# Altium PCB PCB1.PcbDoc
Units mil, origin at the board's own origin, x right, y up, seen from the top; angles counter-clockwise.
Board outline 1335 x 720 mil, 2 copper layers (Top Layer, Bottom Layer); 11 components, 8 nets, 29 pads, 5 vias.
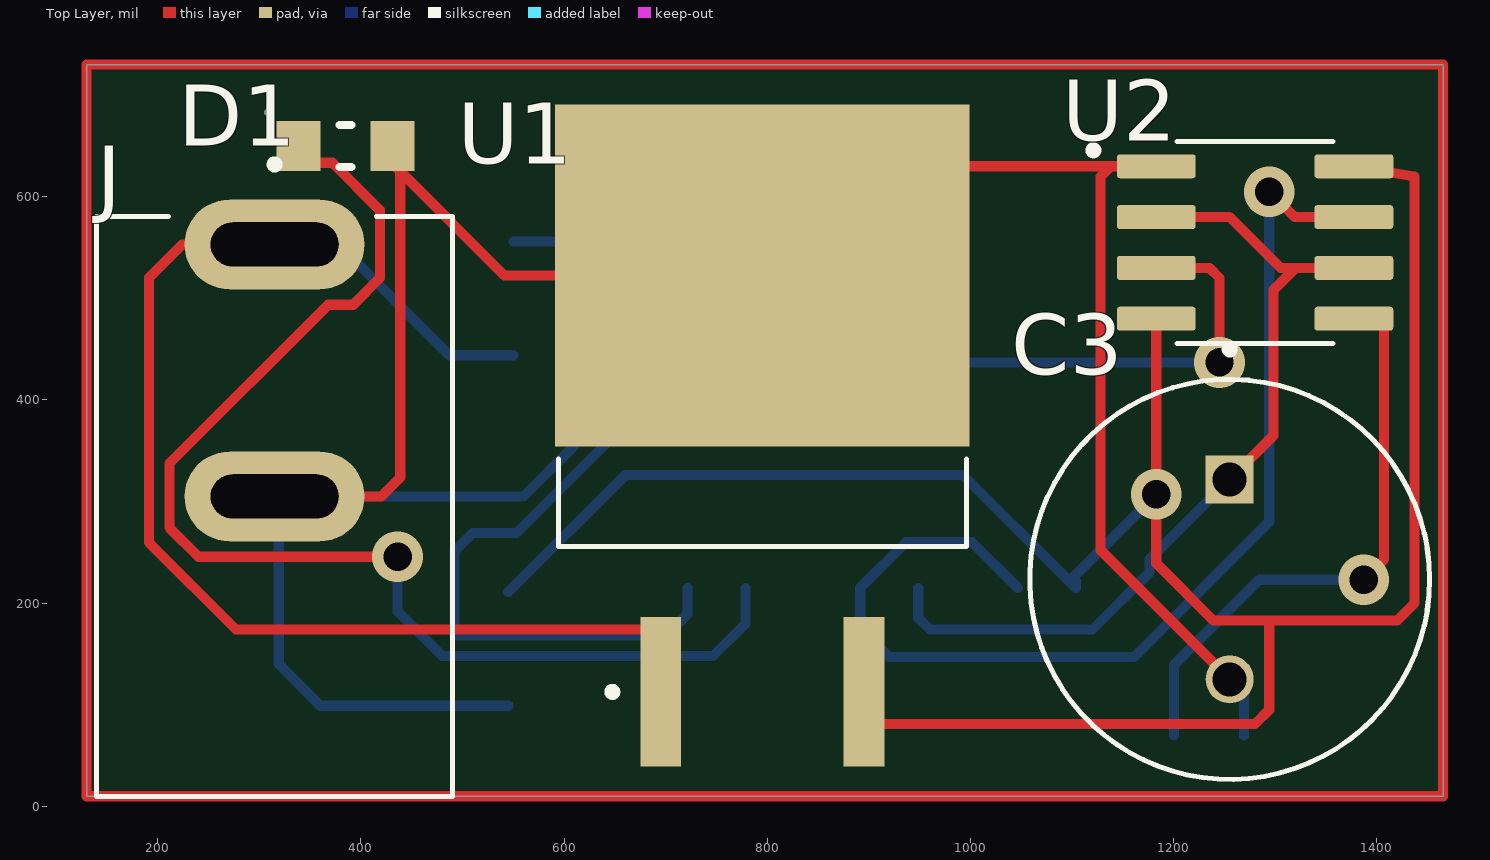
[diagram p0: Top Layer view]
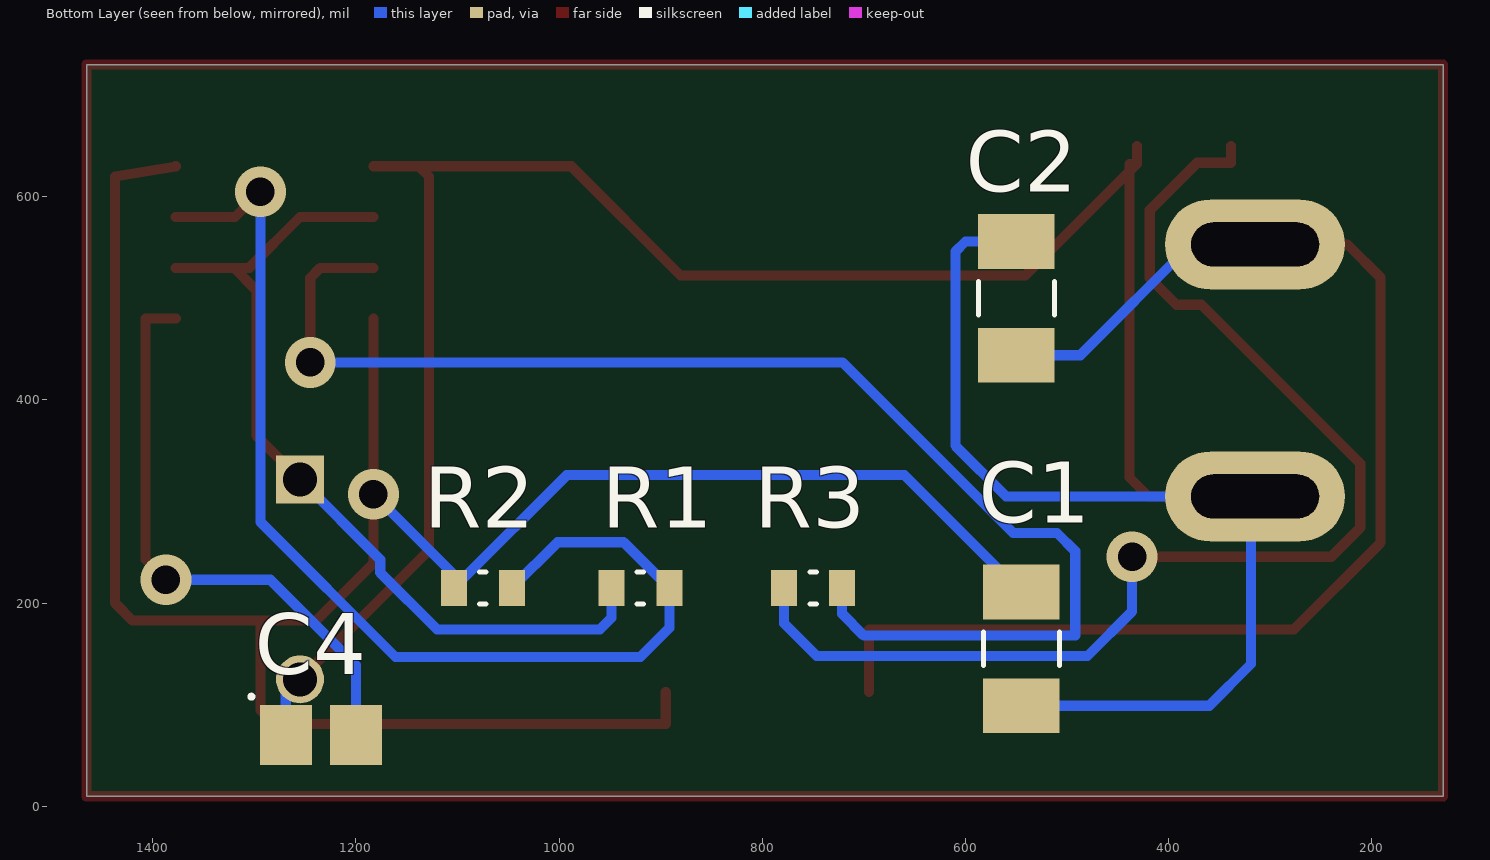
[diagram p1: Bottom Layer view, seen from below]
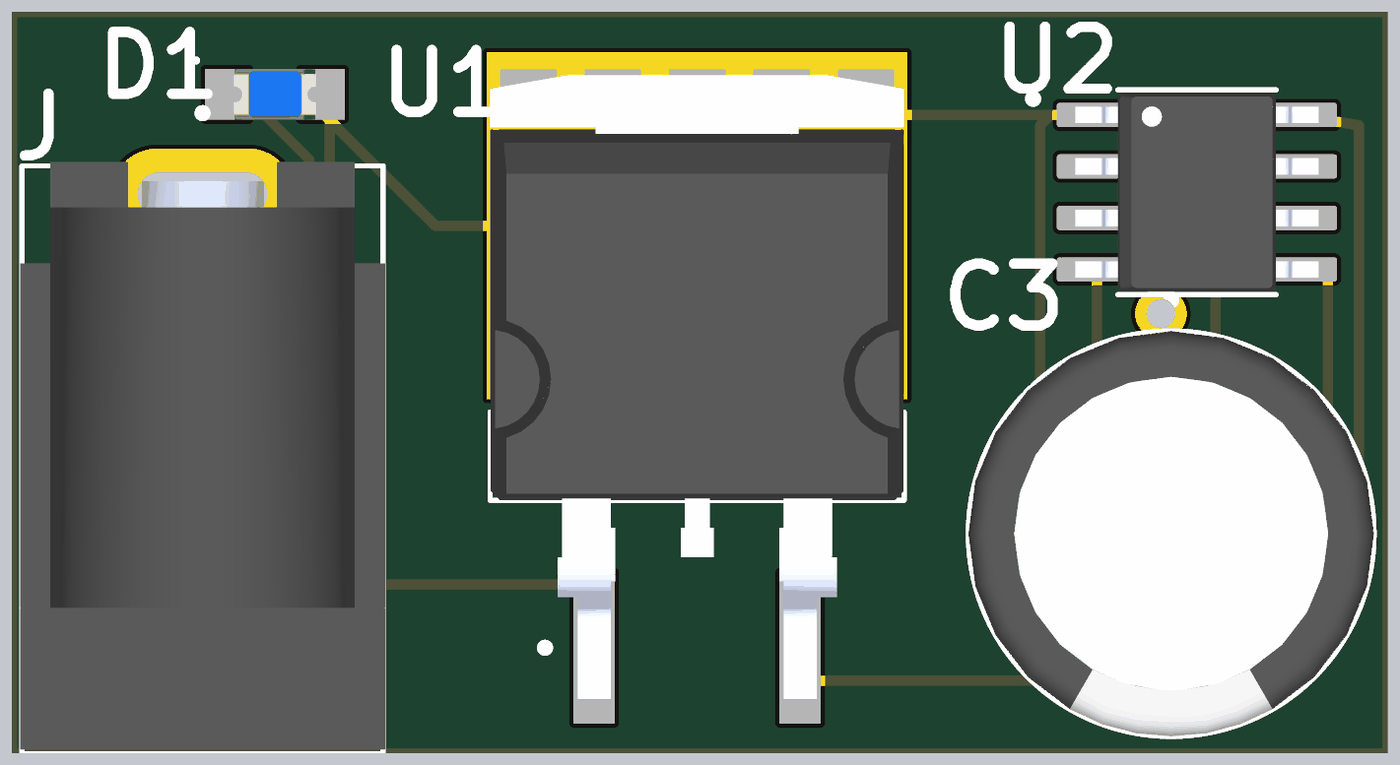
[diagram p2: 3D render of the assembled board from above, using the file's embedded part models]
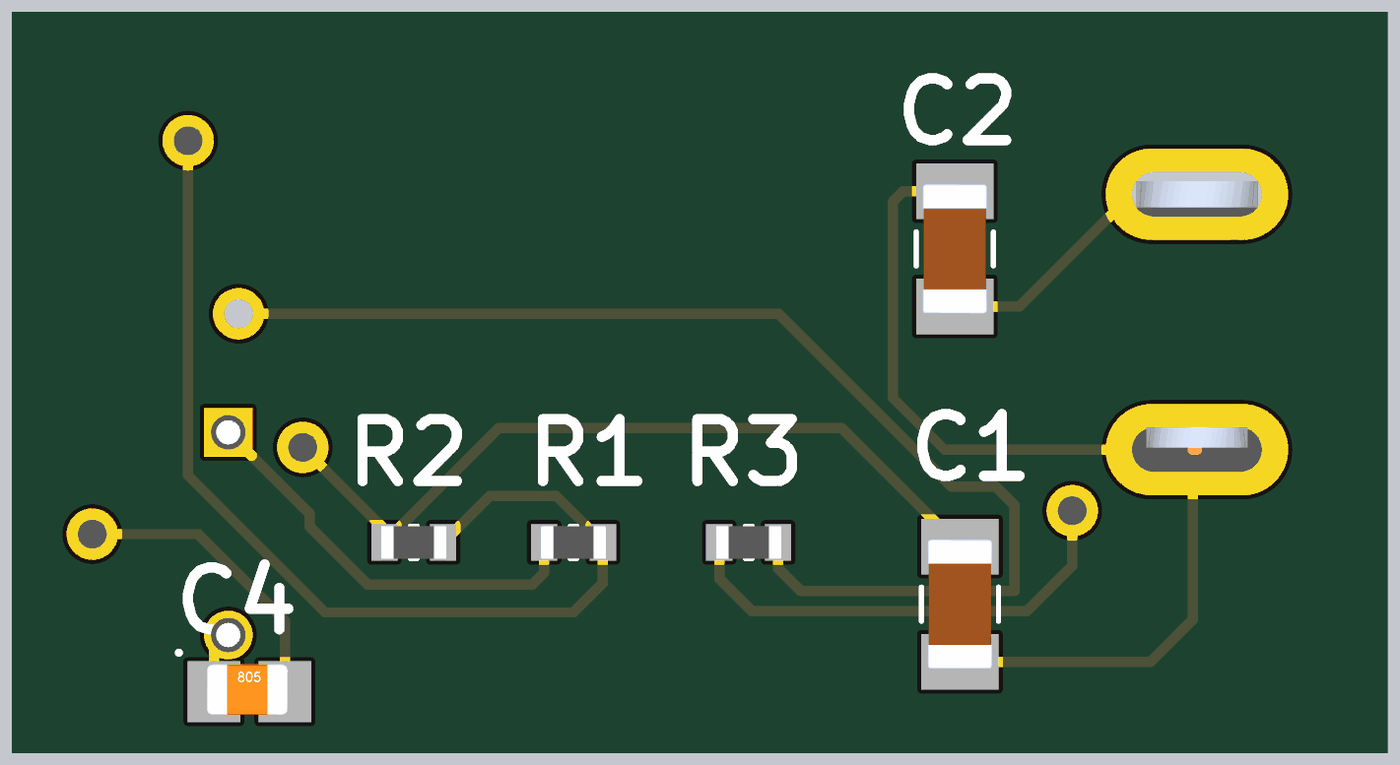
[diagram p3: 3D render of the assembled board from below, using the file's embedded part models]

## Layer stack, top to bottom
Top Solder: solder mask 0.4, Solder Resist, Dk 3.5
Top Layer: signal copper 1.4
Dielectric 1: dielectric 12.6, FR-4, Dk 4.8
Bottom Layer: signal copper 1.4
Bottom Solder: solder mask 0.4, Solder Resist, Dk 3.5

## Board outline
130,10 1465,10 1465,730 130,730

## Design rules (kind name [scope] priority, off if disabled: settings)
Clearance [All] p1: gap=10 ignorepadtopadclearanceinfootprint=FALSE
PolygonConnect [All] p1: connectstyle=Relief reliefconductorwidth=10 reliefentries=4 polygonreliefangle="90 Angle" airgapwidth=10
RoutingVias [All] p1: holewidth=28 width=50 viastyle="Through Hole" minholewidth=28 minwidth=50 maxholewidth=28 maxwidth=50
SolderMaskExpansion [All] p1: expansion=4 istentingtop=FALSE
SupplyNets "Schematic Supply Nets_2" [InNet('VCC')] p1: voltage=0.000
SupplyNets "Schematic Supply Nets_1" [InNet('GND')] p2: voltage=0.000
Width [All] p1: maxlimit=10 minlimit=10 preferedwidth=10
30 further rules are at their usual default settings.

## Components (designator, comment, footprint, x,y, rotation, side; value= is the part's Value field where it differs from the comment)
C1 ".1µF" CAPC3216X190N 545,155 r270 bottom
C2 ".33µF" CAPC3216X190N 550,500 r90 bottom
C3 "EEUED2G100" CAPPRD500W60D1000H2000 1255,223.43 r270 top
C4 "100nF Ceramic Multilayer Capacitor_1" CAPCP2012X09N 1234.52,70 r180 bottom
D1 "Kingbright Blue LED, 60 mcd 120 ° 0805" LED1913X12NBLUE 385,650 r0 top
J "PJ-037AH" CUI_PJ-037AH 315,553.03 r270 top
R1 "Resistor" RES_ERJS03F1001V 920,215 r180 bottom value=1K
R2 "Resistor" RES_ERJS03F1001V 1075,215 r180 bottom value=1K
R3 "Resistor" RES_ERJS03F1001V 750,215 r180 bottom value=1K
U1 "7805CD2T" TO254P1542X460-3N 795,365 r90 top
U2 "LM555CM/NOPB" SOIC127P599X175-8N 1280,555 r0 top

## Footprints (in the part's own frame and the unit in brackets; to place one, negate y for a bottom-side part, rotate by r counter-clockwise, add the part's x,y. Pads: shape width x height; smd on the part's side, far side on the other; paste and mask are expansions set on the pad)
CAPC3216X190N [mm]
  rect 1.37x1.91 smd: 1(-1.421,0) 2(1.421,0)
  silkscreen extent -0.42,-0.95 0.42,0.95, body extent -1.6,-0.8 1.6,0.8, height 1.9
CAPCP2012X09N [mm] "Chip Capacitor, 2-Leads, Body 2.00x1.25mm, IPC Medium Density"
  rect 1.3x1.5 smd: 1(-0.875,0) 2(0.875,0)
  silkscreen extent -1.79,0.91 -1.69,1.01, body extent -1.05,-0.57 0.95,0.68, height 0.78
CAPPRD500W60D1000H2000 [mm]
  round 1.2 hole 0.85: N(2.5,0)
  rect 1.2x1.2 / inner round 1.2 / far side rect 1.2x1.2 hole 0.85: P(-2.5,0)
  silkscreen extent -5.85,-5 5,5, body extent -5,-5 5,5, height 20
CUI_PJ-037AH [mm]
  oval 2.25x4.5 hole 1.1 slot 3.2 at 90 deg: 1(0,0) 2(6.3,0)
  silkscreen extent -2.1,-4.45 13.8,4.45, body extent -0.8,-4.5 13.7,4.5, height 11
LED1913X12NBLUE [mm] "LED 2-Leads, Body 1.90x1.32mm, IPC Medium Density"
  rect 1.1x1.25 smd: 1(-1.175,0) 2(1.175,0)
  silkscreen extent -1.99,-0.53 0.15,0.89, body extent -1,-0.62 1.02,0.63, height 1.1
RES_ERJS03F1001V [mm]
  rect 0.65x0.9 smd: 1(-0.725,0) 2(0.725,0)
  silkscreen extent -0.08,-0.4 0.08,0.4, body extent -0.8,-0.4 0.8,0.4, height 0.45
SOIC127P599X175-8N [mm]
  rrect25% 1.97x0.6 smd: 1(-2.47,1.905) 2(-2.47,0.635) 3(-2.47,-0.635) 4(-2.47,-1.905) 5(2.47,-1.905) 6(2.47,-0.635) 7(2.47,0.635) 8(2.47,1.905)
  silkscreen extent -4.14,-2.53 1.95,2.53, body extent -3,-2.45 3,2.45, height 1.75
TO254P1542X460-3N [mm]
  rect 3.74x1.02 smd: 1(-6.41,2.54) 2(-6.41,-2.54)
  rect 8.56x10.37 smd paste-6: 3(4,0)
  silkscreen extent -6.51,-5.1 -0.59,5.1, body extent -7.71,-5.1 7.71,5.1, height 4.6

## Part data
C1 C2: library part GRM31CR60J227ME11L, "SMD Multilayer Ceramic Capacitor, GRM Series, 220 F, 20%, X5R, 6.3 V, 1206 [3216 Metric]", Package="3216 Murata", Check_prices=https://www.snapeda.com/parts/GRM31CR60J227ME11L/Murata%20Electronics%20North%20America/view-part/1756709/?ref=eda, Digi-Key_Part_Number=490-13970-1-ND, MF="Murata Electronics", MP=GRM31CR60J227ME11L, Purchase-URL=https://pricing.snapeda.com/search/part/GRM31CR60J227ME11L/?ref=eda, SnapEDA_Link=https://www.snapeda.com/parts/GRM31CR60J227ME11L/Murata%20Electronics%20North%20America/view-part/1756709/?ref=snap
C3: "10F 400V Aluminum Electrolytic Capacitors Radial, Can 8000 Hrs @ 105C", Package="RADIAL-2 Panasonic", Check_prices=https://www.snapeda.com/parts/EEU-ED2G100/Panasonic+Electronic+Components/view-part/?ref=eda, MF="Panasonic Electronic", MP=EEU-ED2G100, SnapEDA_Link=https://www.snapeda.com/parts/EEU-ED2G100/Panasonic+Electronic+Components/view-part/?ref=snap
C4: "AVX 0805 Standard 100nF Ceramic Multilayer Capacitor, 50 V dc X7R Dielectric ±10% SMD", Capacitance=100nF, Manufacturer=AVX, Package=0805, Voltage=50V, Creator="Ritesh Kanjee", Datasheet URL=http://za.rs-online.com/web/p/ceramic-multilayer-capacitors/4646688/, Date Created="18 February 2015", RS Stock No.=464-6688
D1: library part "Kingbright Orange LED, 200 mcd 120 ° 0805", "Kingbright Orange LED, 200 mcd 120 ° 0805", Color=Orange, Forward Voltage=1.85V, Manufacturer=KingBright, Manufacturer Part No.=KP-2012SEC, Creator="Ritesh Kanjee", Datasheet URL=http://za.rs-online.com/web/p/visible-leds/4663790/, Date Created="18 February 2015", RS Stock No.=466-3790
J: "2.0 x 6.5 mm, 5.0 A, Horizontal, Through Hole, Dc Power Jack Connector", Package=None, Check_prices=https://www.snapeda.com/parts/PJ-037AH/CUI+Devices/view-part/?ref=eda, CUI_purchase_URL=https://www.cuidevices.com/product/interconnect/connectors/dc-power-connectors/jacks/pj-037ah?utm_source=snapeda.com&utm_medium=referral&utm_campaign=snapedaBOM, MF="CUI Devices", MP=PJ-037AH, SnapEDA_Link=https://www.snapeda.com/parts/PJ-037AH/CUI+Devices/view-part/?ref=snap
U1: "Linear Voltage Regulator IC Positive Fixed 1 Output 1.5A D2PAK", Package="D2PAK STMicroelectronics", Check_prices=https://www.snapeda.com/parts/7805CD2T/STMicroelectronics/view-part/?ref=eda, MF=STMicroelectronics, MP=7805CD2T, SnapEDA_Link=https://www.snapeda.com/parts/7805CD2T/STMicroelectronics/view-part/?ref=snap
U2: "Highly Stable 555 Timer", Package="SOIC-8 Texas Instruments", Availability="In Stock", Check_prices=https://www.snapeda.com/parts/LM555CM/NOPB/Texas+Instruments/view-part/?ref=eda, MF="Texas Instruments", MP=LM555CM/NOPB, Price=None, Purchase-URL=https://pricing.snapeda.com/search/part/LM555CM/NOPB/?ref=eda, SnapEDA_Link=https://www.snapeda.com/parts/LM555CM/NOPB/Texas+Instruments/view-part/?ref=snap
R1 R2 R3: SimulationGenericComponent=True, TC1=0, TC2=0

## Via types
v1: diameter 50, hole 28, Top Layer to Bottom Layer, 5 vias

## Nets (pads, with @x,y where several pads share a name; then routed paths per layer and width w, separated by ;. In a path a pad name is that pad's centre, name@x,y a point inside that pad or via, vN(x,y) a via of type N, cw(c..) or ccw(c..) an arc to the next point about the centre after c; other vN are vias at no path point)
GND: C1.2 C2.2 C3.N C4.1 D1.2 J.2 U1.3 U2.1 | length 2907.8
  Top Layer w10: J.2 420,305 438.58,323.58 438.58,625 ; D1.2 D1.2@431.26,632.32 ; U2.1 1138,630 ; C3.N 1128,252 1128,620 1138,630 ; D1.2@431.26,632.32 438.58,625 ; D1.2@431.26,632.32 438.58,632.32 438.58,625 ; 438.58,625 541.1,522.48 U1.3 880.48,522.48 988,630 1138,630
  Bottom Layer w10: J.2 J.2@319,305 ; C1.2 360,99.06 319,140.06 J.2@319,305 ; C2.2 600,555.94 610,545.94 610,355 560,305 J.2@319,305 ; C3.N 1268.97,111.03 C4.1
NetC2_1: C2.1 J.1 U1.1 | length 1278.5
  Top Layer w10: J.1 224.03,553.03 191.42,520.42 191.42,259.58 277,174 695,174 U1.1
  Bottom Layer w10: J.1 378,553.03 486.98,444.06 C2.1
NetC3_P: C3.P R1.1 U2.2 U2.6 | length 859.8
  Top Layer w10: U2.2 1255,580 1305,530 1320,530 ; C3.P 1298,364.85 1298,508 1320,530 ; U2.6 1320,530
  Bottom Layer w10: R1.1 948.54,185.46 960,174 1120,174 1176,230 1176,242.85 C3.P
NetC4_2: C4.2 U2.5 | length 585.7
  Top Layer w10: U2.5 1407,480 1407,243 v1(1387,223)
  Bottom Layer w10: C4.2 1200.07,138.85 1284.23,223 v1(1387,223)
NetD1_1: D1.1 R3.1 | length 1227.6
  Top Layer w10: D1.1 338.74,633.39 372,633.39 418.58,586.81 418.58,520 392.32,493.74 367.74,493.74 211.42,337.42 211.42,274.29 240,245.71 v1(436,245.71)
  Bottom Layer w10: v1(436,245.71) 436,192 480,148 746.54,148 778.54,180 R3.1
NetR1_2: R1.2 R2.2 U2.7 | length 1119.8
  Top Layer w10: v1(1294,605) 1319,580 U2.7
  Bottom Layer w10: R2.2 1001.46,260 936.46,260 R1.2 891.46,175.54 920,147 1161,147 1294,280 v1(1294,605)
NetR3_2: R3.2 U2.3 | length 1326.3
  Top Layer w10: U2.3 1235,530 1245,520 v1(1245,437)
  Bottom Layer w10: R3.2 721.46,189.46 700,168 492,168 492,251 510,269 553,269 721,437 v1(1245,437)
VCC: C1.1 R2.1 U1.2 U2.4 U2.8 | length 2316.8
  Top Layer w10: U1.2 895,81 1280,81 1294,95 1294,183 ; U2.4 v1(1182.76,307.21) 1182.76,239.24 1239,183 1294,183 ; U2.8 1437,620 1437,200 1420,183 1294,183
  Bottom Layer w10: C1.1 660.06,326 992.54,326 R2.1@1097.04,221.5 ; v1(1182.76,307.21) R2.1@1097.04,221.5 ; R2.1@1097.04,221.5 1103.54,221.5 R2.1 R2.1@1097.04,221.5
copper on no net: | length 4110
  Top Layer w10: 130,10 1465,10 1465,730 130,730 130,10